# Altium PCB Boost.PcbDoc
Units mm, origin at the board's own origin, x right, y up, seen from the top; angles counter-clockwise.
Board outline 46 x 44 mm, 2 copper layers (Top Layer, Bottom Layer); 10 components, 6 nets, 34 pads, 0 vias.
Unrouted connection lines stored in the file: 2.
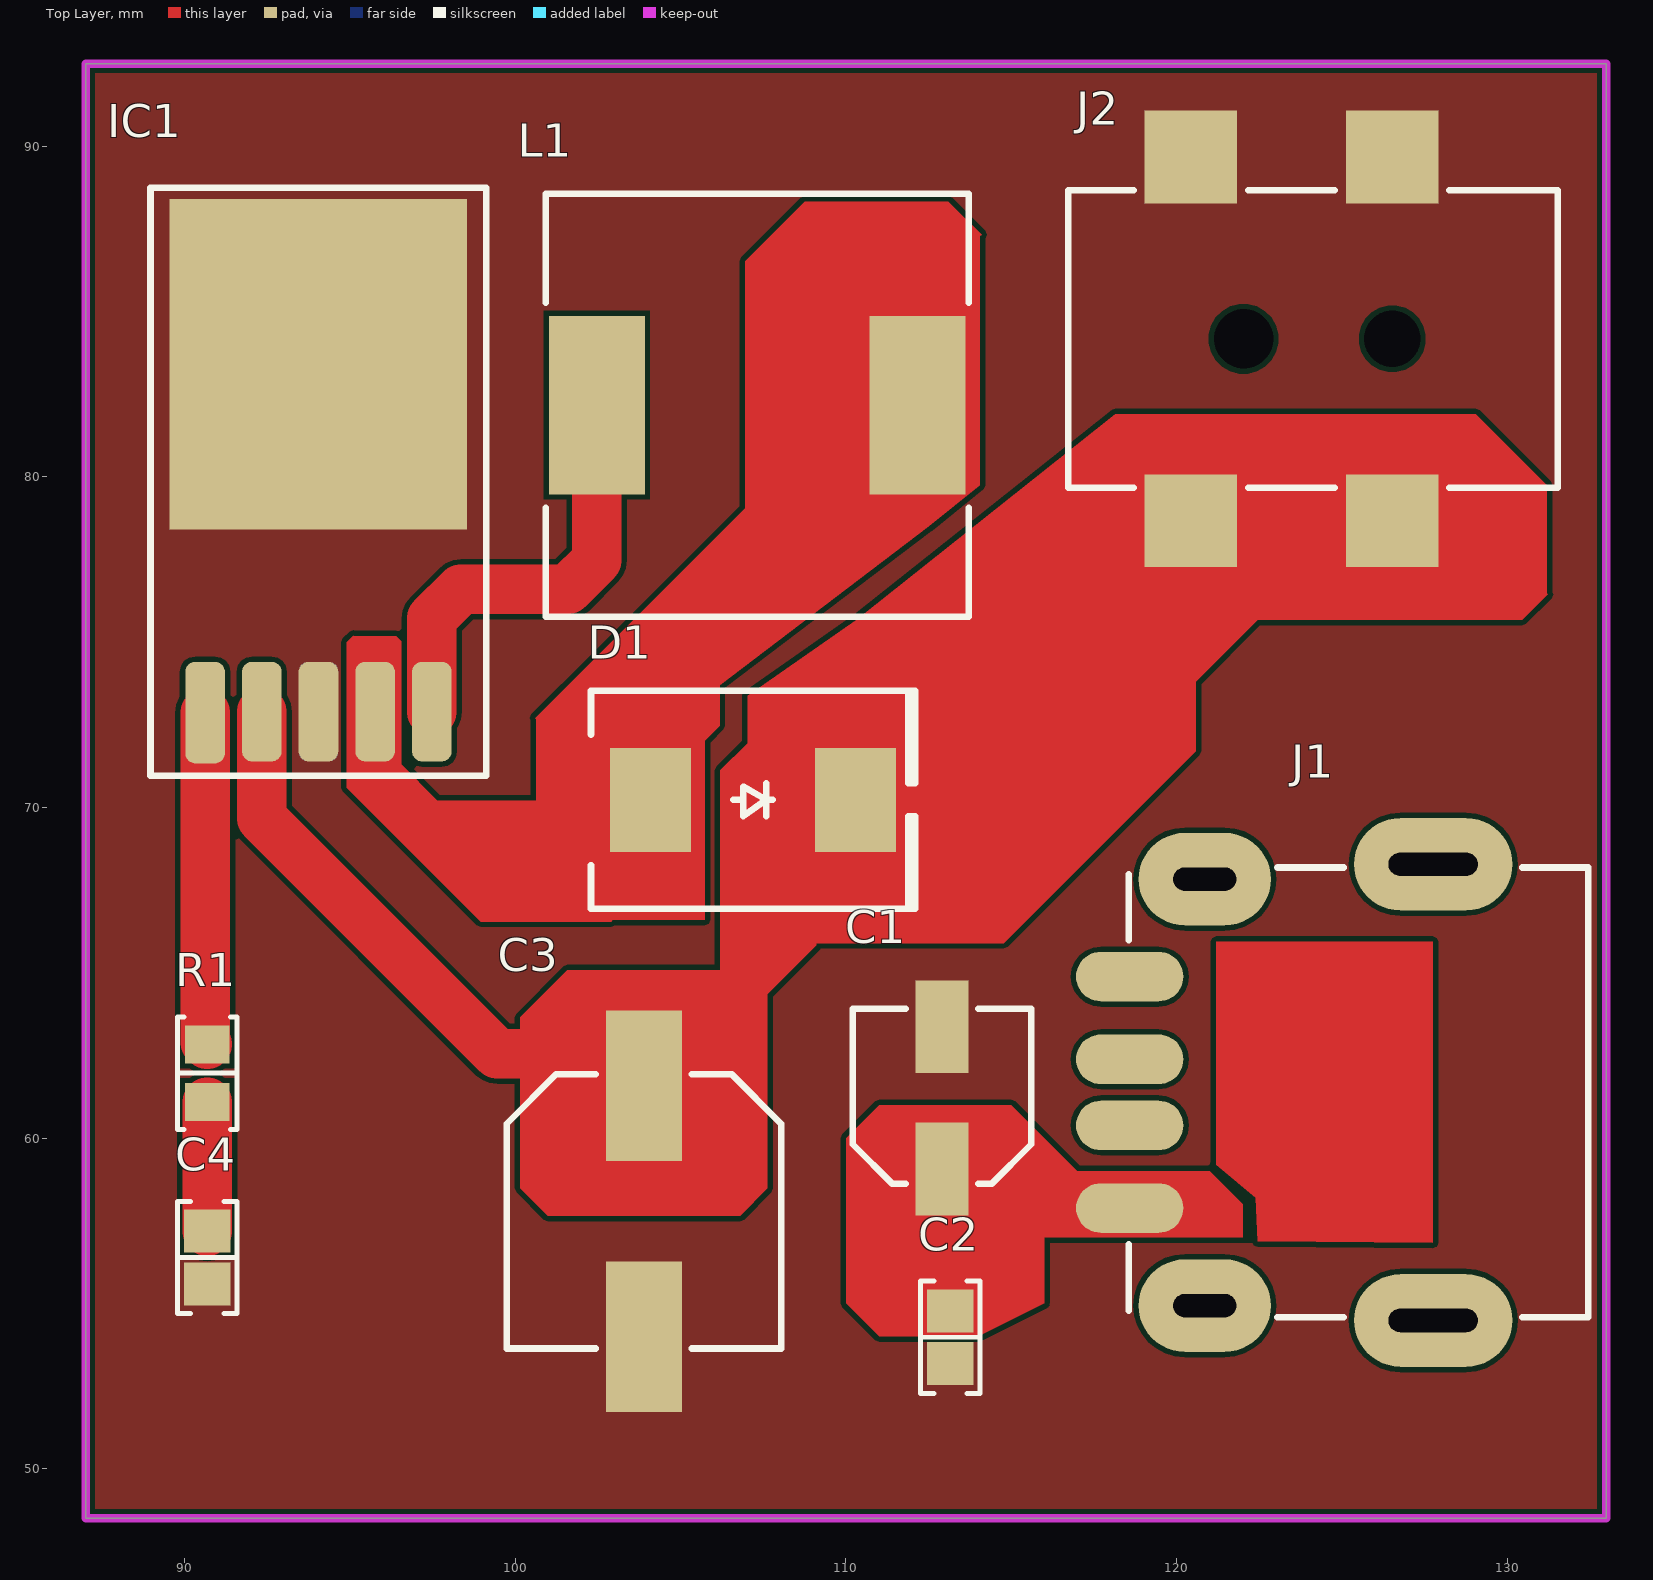
[diagram p0: Top Layer view]
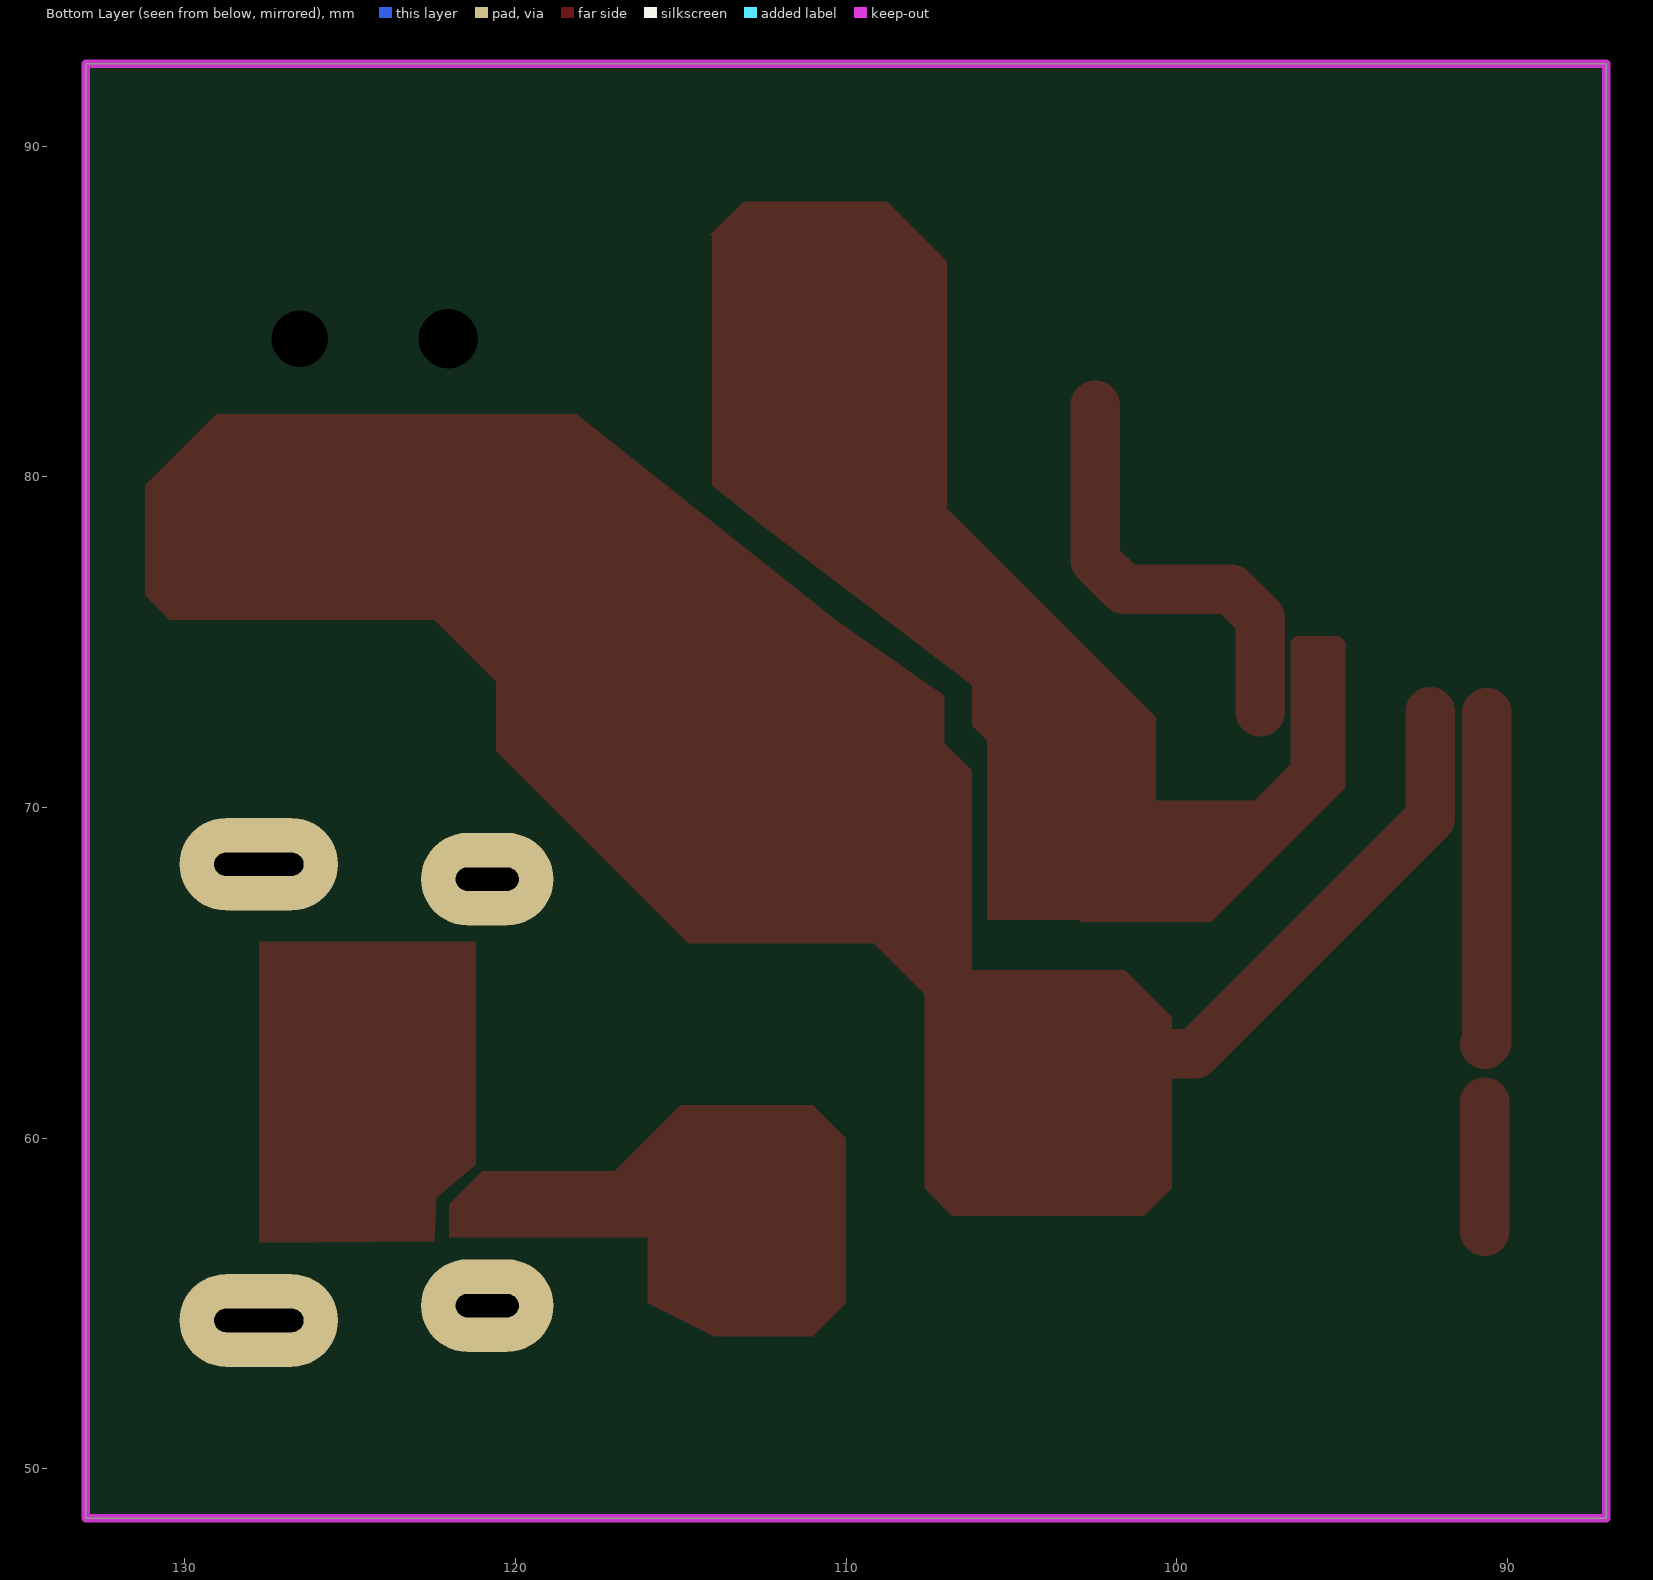
[diagram p1: Bottom Layer view, seen from below]
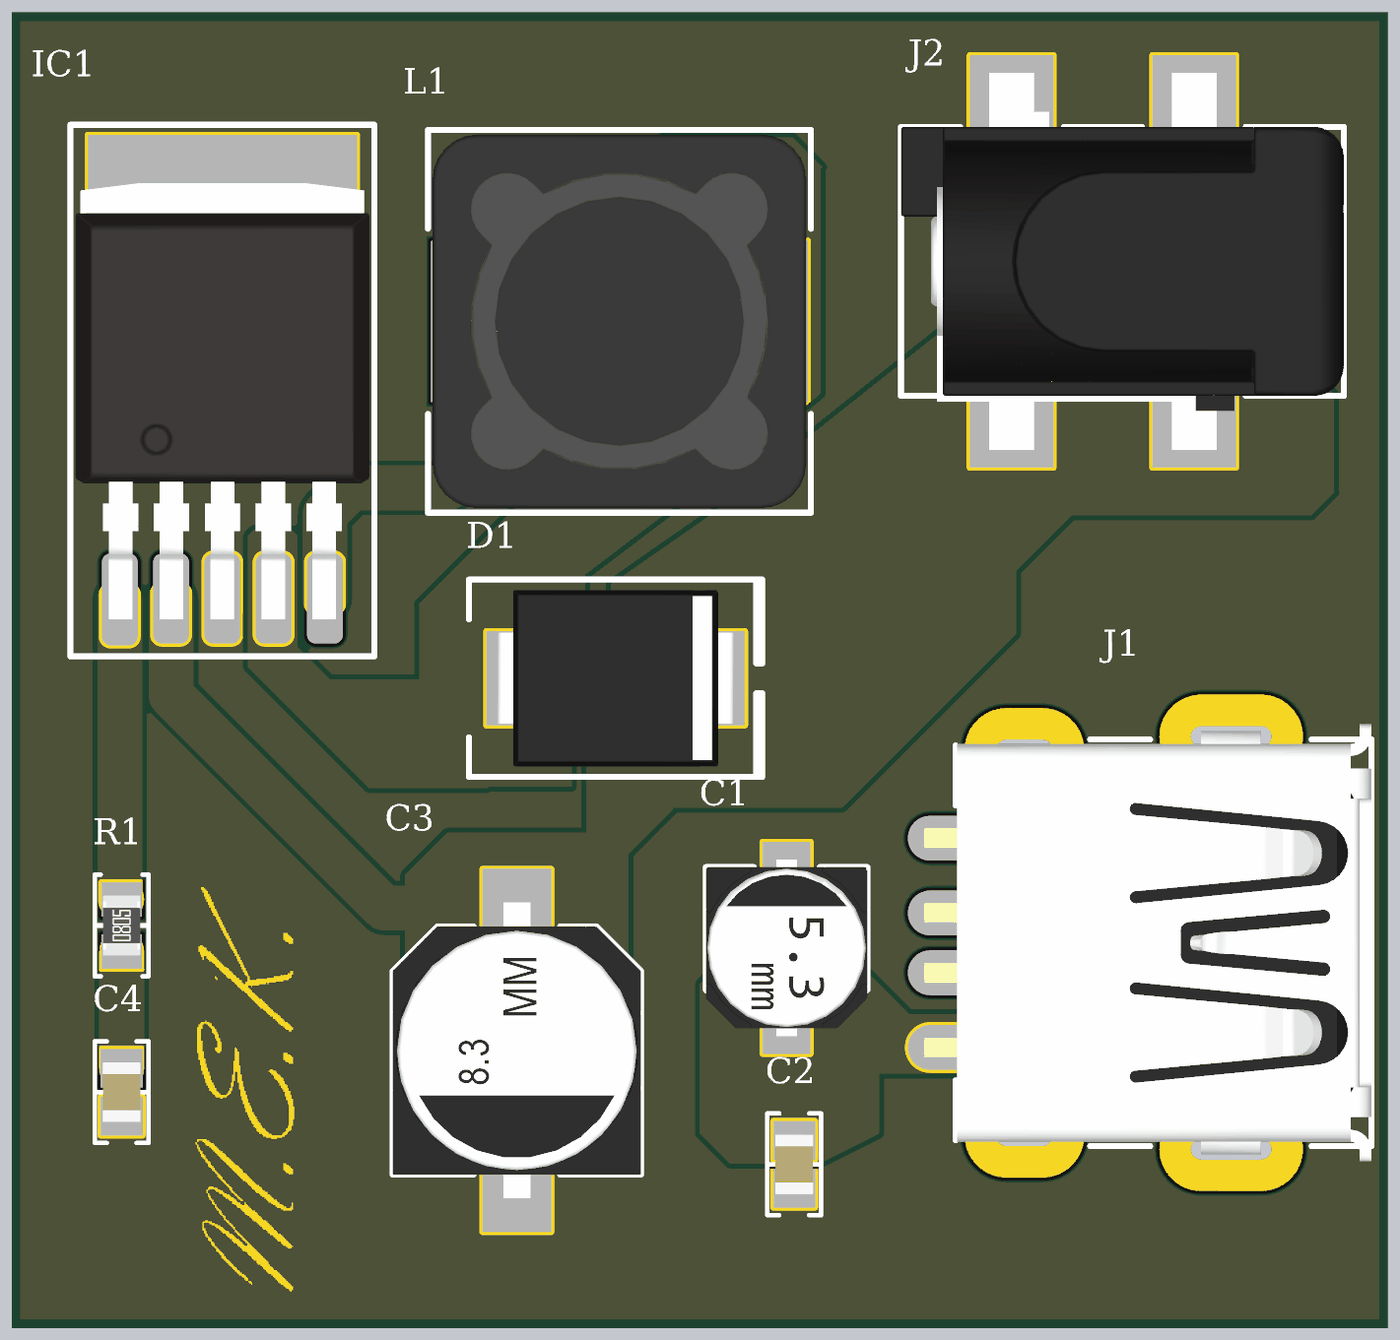
[diagram p2: 3D render of the assembled board from above, using the file's embedded part models]

## Layer stack, top to bottom
Top Solder: solder mask 0.0102, Solder Resist, Dk 3.5
Top Layer: signal copper 0.0356
Dielectric 1: dielectric 0.32, FR-4, Dk 4.8
Bottom Layer: signal copper 0.0356
Bottom Solder: solder mask 0.0102, Solder Resist, Dk 3.5

## Board outline
87,48.5 133,48.5 133,92.5 87,92.5

## Design rules (kind name [scope] priority, off if disabled: settings)
Clearance [All] p1: gap=0.152 ignorepadtopadclearanceinfootprint=FALSE
PolygonConnect [All] p1: connectstyle=Direct reliefconductorwidth=0.254 reliefentries=4 polygonreliefangle="90 Angle" airgapwidth=0.254
RoutingVias [All] p1: holewidth=0.5 width=0.7 viastyle="Through Hole" minholewidth=0.3 minwidth=0.5 maxholewidth=1 maxwidth=2
SolderMaskExpansion [All] p1: expansion=0.102 istentingtop=FALSE
Width [All] p1: maxlimit=5 minlimit=0.152 preferedwidth=0.5
30 further rules are at their usual default settings.

## Classes and differential pairs
component class Boost: C1 C2 C3 C4 D1 IC1 J2 L1 R1

## Components (designator, comment, footprint, x,y, rotation, side; value= is the part's Value field where it differs from the comment)
C1 "100µF" "CAP ALSMD 5.3MM H5.4MM" 112.903,61.214 r90 top
C2 "0.1µF" "CAP 0805_2012" 113.157,53.975 r90 top
C3 "680µF" "CAP ALSMD 8.3MM H10.5MM" 103.886,57.785 r270 top
C4 "1µF" "CAP 0805_2012" 90.678,56.388 r90 top
D1 "SURS8360T3G" "DO214AB SMC" 107.188,70.231 r0 top
IC1 "LM2587" D2PAK 94.043,81.758 r0 top
J1 "1932638-3" "TE 1932638-3 USB2.0A" 120.852,61.383 r90 top
J2 "PJ-002AH-SMT-TR" "CUI PJ-002AH-SMT-TR" 124.275,84.175 r180 top
L1 "15µH" "BOURNS SRR1280" 107.315,82.169 r0 top
R1 "3 kOhms" "RES 0805_2012" 90.678,61.962 r90 top

## Footprints (in the part's own frame and the unit in brackets; to place one, negate y for a bottom-side part, rotate by r counter-clockwise, add the part's x,y. Pads: shape width x height; smd on the part's side, far side on the other; paste and mask are expansions set on the pad)
"BOURNS SRR1280" [mm] "Precision Wire Wound Inductor, 2-Leads, Body 12.50x12.50mm, IPC Medium Density"
  rect 2.9x5.4 smd: 1(-4.85,0) 2(4.85,0)
  silkscreen extent -6.4,-6.4 6.4,6.4, body extent -6.25,-6.25 6.25,6.25, height 7.9
"CAP 0805_2012" [mm] "Chip Capacitor, 2-Leads, Body 2.00x1.20mm, IPC Medium Density"
  rect 1.3x1.4 smd: 1(-0.8,0) 2(0.8,0)
  silkscreen extent -1.7,-0.9 1.7,0.9, body extent -1,-0.64 1,0.64, height 1.26
"CAP ALSMD 5.3MM H5.4MM" [mm] "Aluminum Electrolytic Capacitor, Body 5.30x5.30x5.40mm, IPC Low Density"
  rect 2.8x1.6 smd: 1(-2.15,0) 2(2.15,0)
  silkscreen extent -2.6,-2.7 2.7,2.7, body extent -2.95,-2.7 2.95,2.7, height 5.4
"CAP ALSMD 8.3MM H10.5MM" [mm] "Aluminum Electrolytic Capacitor, Body 8.30x8.30x10.50mm, IPC Low Density"
  rect 4.55x2.3 smd: 1(-3.8,0) 2(3.8,0)
  silkscreen extent -4.15,-4.15 4.15,4.15, body extent -4.95,-4.15 4.95,4.15, height 10.5
"CUI PJ-002AH-SMT-TR" [mm]
  rect 2.8x2.8 smd: 1(-2.25,5.5) 1(3.85,5.5) 2(-2.25,-5.5) 3(3.85,-5.5)
  round 0 hole 1.7 unplated: M(-2.25,0)
  round 0 hole 1.8 unplated: M(2.25,0)
  silkscreen extent -7.25,-4.5 7.55,4.5, body extent -7.25,-6.3 7.55,6.3, height 11.4
D2PAK [mm]
  rrect50% 1.2x3.075 smd: 1(-3.429,-8.89)
  rrect50% 1.2x3.015 smd: 2(-1.714,-8.86) 3(0,-8.86) 4(1.714,-8.86) 5(3.429,-8.86)
  rect 9x10 smd: 3(0,1.651)
  silkscreen extent -5.08,-10.79 5.08,6.98, body extent -4.91,-9.56 4.91,5.04, height 4.22
"DO214AB SMC" [mm] "Molded Diode, 2-Leads, Body 6.85x5.90mm, IPC Medium Density"
  rect 2.45x3.15 smd: 1(-3.1,0) 2(3.1,0)
  silkscreen extent -4.9,-3.3 4.9,3.3, body extent -3.97,-2.95 3.97,2.95, height 2.6
"RES 0805_2012" [mm] "Chip Resistor, 2-Leads, Body 2.00x1.25mm, IPC Medium Density"
  rect 1.15x1.35 smd: 1(-0.875,0) 2(0.875,0)
  silkscreen extent -1.7,-0.9 1.7,0.9, body extent -1,-0.62 1,0.63, height 0.6
"TE 1932638-3 USB2.0A" [mm] "USB 2.0 Type A RCP 4 POS Solder RA SMD 4 Terminal 1 Port T/R"
  oval 1.5x3.25 smd: 1(-3.5,2.27) 2(-1,2.27) 3(1,2.27) 4(3.5,2.27)
  oval 2.8x4.8 hole 0.7 slot 2.7 at 90 deg: S(-6.9,-6.91) S(6.9,-6.91)
  oval 2.8x4 hole 0.7 slot 1.9 at 90 deg: S(-6.45,0) S(6.45,0)
  Top Layer pour cut-out: -4.55,-0.35 -4.55,-6.9 4.55,-6.9 4.55,-0.35
  silkscreen extent -6.8,-11.6 6.8,2.3, body extent -7.32,-11.6 7.32,3.34, height 7.64

## Part data
C1: library part EEE-1AA101WR, "CAP ALUM 100UF 20% 10V SMD", Device Package="Radial, Can - SMD", Lifetime @ Temp.="1000 Hrs @ 85°C", Manufacturer="Panasonic Electronic Components", Operating Temperature="-40°C ~ 85°C", Ratings=AEC-Q200, Ripple Current @ High Frequency="85mA @ 10kHz", Ripple Current @ Low Frequency="50mA @ 120Hz", Supplier Part Number 1=PCE3867CT-ND, Tolerance=±20%, Voltage - Rated=10V, Applications=Automotive, Capacitance=100µF, ComponentLink1Description=Datasheet, ComponentLink1URL=//media.digikey.com/pdf/Data%20Sheets/Panasonic%20Electronic%20Components/S_Series,Type_V_Rev2018.pdf, ComponentLink2Description="DigiKey Link", ComponentLink2URL=http://digikey.com/product-detail/en/panasonic-electronic-components/EEE-1AA101WR/PCE3867CT-ND/766243, Height - Seated (Max)="0.213\" (5.40mm)", LastUpdated="2.09.2020 01:25:24", Lifecycle Status=Active, Minimum Order=1, Mounting Type="Surface Mount", Package / Case="Radial, Can - SMD", Packaging=TapeAndReel, Part Number=EEE-1AA101WR, Part Status=Active, PartId=7834, Polarization=Polar, Price=0.08, Series=S, Size / Dimension="0.197\" Dia (5.00mm)", Supplier 1=DigiKey, Surface Mount Land Size="0.209\" L x 0.209\" W (5.30mm x 5.30mm)"
C2: library part C0805C104J8RACTU, "CAP CER 0.1UF 10V X7R 0805", Device Package="0805 (2012 Metric)", Manufacturer=KEMET, Operating Temperature="-55°C ~ 125°C", Supplier Part Number 1=399-7998-1-ND, Temperature Coefficient=X7R, Tolerance=±5%, Voltage - Rated=10V, Applications="Bypass, Decoupling", Capacitance=0.1µF, ComponentLink1Description=Datasheet, ComponentLink1URL=https://api.kemet.com/component-edge/download/datasheet/C0805C104J8RACTU.pdf, ComponentLink2Description="DigiKey Link", ComponentLink2URL=http://digikey.com/product-detail/en/kemet/C0805C104J8RACTU/399-7998-1-ND/3471721, LastUpdated="2.09.2020 01:04:35", Lifecycle Status=Active, Minimum Order=1, Mounting Type="Surface Mount, MLCC", Package / Case="0805 (2012 Metric)", Packaging=TapeAndReel, Part Number=C0805C104J8RACTU, Part Status=Active, PartId=6082, Price=0.14, Series="SMD Comm X7R", Size / Dimension="0.079\" L x 0.049\" W (2.00mm x 1.25mm)", Supplier 1=DigiKey, Thickness (Max)="0.035\" (0.88mm)"
C3: library part EEE-FT1C681GP, "CAP ALUM 680UF 20% 16V SMD", Device Package="Radial, Can - SMD", ESR (Equivalent Series Resistance)="80mOhm @ 100kHz", Lifetime @ Temp.="5000 Hrs @ 105°C", Manufacturer="Panasonic Electronic Components", Operating Temperature="-55°C ~ 105°C", Ratings=AEC-Q200, Ripple Current @ Low Frequency="595mA @ 120Hz", Supplier Part Number 1=PCE5114CT-ND, Tolerance=±20%, Voltage - Rated=16V, Applications=Automotive, Capacitance=680µF, ComponentLink1Description=Datasheet, ComponentLink1URL=https://na.industrial.panasonic.com/file-download/3112, ComponentLink2Description="DigiKey Link", ComponentLink2URL=http://digikey.com/product-detail/en/panasonic-electronic-components/EEE-FT1C681GP/PCE5114CT-ND/6048926, Height - Seated (Max)="0.413\" (10.50mm)", LastUpdated="2.09.2020 01:25:14", Lifecycle Status=Active, Minimum Order=1, Mounting Type="Surface Mount", Package / Case="Radial, Can - SMD", Packaging=TapeAndReel, Part Number=EEE-FT1C681GP, Part Status=Active, PartId=7673, Polarization=Polar, Price=0.37, Series=FT, Size / Dimension="0.315\" Dia (8.00mm)", Supplier 1=DigiKey, Surface Mount Land Size="0.327\" L x 0.327\" W (8.30mm x 8.30mm)"
C4: library part MM05ZC105KCZ2A, "CAP CER 1UF 10V X7R 0805", Device Package="0805 (2012 Metric)", Manufacturer="AVX Corporation", Operating Temperature="-55°C ~ 125°C", Supplier Part Number 1=478-10611-1-ND, Temperature Coefficient=X7R, Tolerance=±10%, Voltage - Rated=10V, Applications="Medical, Non-Critical", Capacitance=1µF, ComponentLink1Description=Datasheet, ComponentLink1URL=http://datasheets.avx.com/AVX-MM.pdf, ComponentLink2Description="DigiKey Link", ComponentLink2URL=http://digikey.com/product-detail/en/avx-corporation/MM05ZC105KCZ2A/478-10611-1-ND/7344872, LastUpdated="2.09.2020 01:04:42", Lifecycle Status=Active, Minimum Order=1, Mounting Type="Surface Mount, MLCC", Package / Case="0805 (2012 Metric)", Packaging=TapeAndReel, Part Number=MM05ZC105KCZ2A, Part Status=Active, PartId=2439, Price=0.50, Series=MM, Size / Dimension="0.079\" L x 0.049\" W (2.01mm x 1.25mm)", Supplier 1=DigiKey, Thickness (Max)="0.029\" (0.74mm)"
D1: "DIODE GEN PURP 600V 3A SMC", Current - Average Rectified (Io)=3A, Current - Reverse Leakage @ Vr="10µA @ 600V", Manufacturer="ON Semiconductor", Operating Temperature - Junction="-65°C ~ 175°C", Package / Case="DO-214AB, SMC", Supplier Device Package=SMC, Supplier Part Number 1=SURS8360T3GOSCT-ND, Voltage - DC Reverse (Vr) (Max)=600V, Voltage - Forward (Vf) (Max) @ If="1.25V @ 3A", ComponentLink1Description=Datasheet, ComponentLink1URL=http://www.onsemi.com/pub/Collateral/MURS320T3-D.PDF, ComponentLink2Description="DigiKey Link", ComponentLink2URL=http://digikey.com/product-detail/en/on-semiconductor/SURS8360T3G/SURS8360T3GOSCT-ND/9087771, Diode Type=Standard, LastUpdated="2020-09-02 01:18:57", Lifecycle Status=Active, Minimum Order=1, Mounting Type="Surface Mount", Packaging=TapeAndReel, Part Number=SURS8360T3G, Part Status=Active, PartId=348, Price=0.30, Reverse Recovery Time (trr)=75ns, Series=-, Speed="Fast Recovery =< 500ns, > 200mA (Io)", Supplier 1=DigiKey
IC1: "Boost Converter"
J1: "CONN RCPT USB2.0 TYPEA 4P SMD RA", Current Rating (Amps)="1A per Contact", Manufacturer="TE Connectivity AMP Connectors", Operating Temperature="-55°C ~ 85°C", Supplier Part Number 1=A117902TR-ND, Voltage - Rated=30VAC, ComponentLink1Description=Datasheet, ComponentLink1URL=https://www.te.com/commerce/DocumentDelivery/DDEController?Action=srchrtrv&DocNm=501-60007-1&DocType=SS&DocLang=EN, ComponentLink2Description="DigiKey Link", ComponentLink2URL=//digikey.com/product-detail/en/te-connectivity-amp-connectors/1932638-3/A117902TR-ND/4731612, Connector Type="USB - A", Features="Solder Retention", Gender=Receptacle, LastUpdated="9.12.2019 20:47:08", Lifecycle Status=0, Mating Cycles=1500, Minimum Order=1, Mounting Feature=Horizontal, Mounting Type="Surface Mount, Right Angle", Number of Contacts=4, Number of Ports=1, Packaging=TapeAndReel, Part Number=1932638-3, Part Status=Active, Price=0.97, Series=-, Shielding=Shielded, Specifications="USB 2.0", Supplier 1=DigiKey, Termination=Solder
J2: "CONN PWR JACK 2X5.5MM SOLDER", Current Rating (Amps)=5A, Manufacturer="CUI Devices", Material Flammability Rating="UL94 V-0", Supplier Part Number 1=CP-002AHPJCT-ND, Voltage - Rated=24VDC, Actual Diameter="0.079\" (2.00mm ID), 0.256\" (6.50mm OD)", ComponentLink1Description=Datasheet, ComponentLink1URL=https://www.cuidevices.com/product/resource/digikeypdf/pj-002ah-smt-tr.pdf, ComponentLink2Description="DigiKey Link", ComponentLink2URL=http://digikey.com/product-detail/en/cui-devices/PJ-002AH-SMT-TR/CP-002AHPJCT-ND/669692, Connector Type=Jack, Features="Board Guide", Gender=Male, LastUpdated="26.05.2020 13:33:39", Lifecycle Status=Active, Mating Length/Depth="0.350\" (8.90mm)", Minimum Order=1, Mounting Type="Surface Mount", Number of Positions/Contacts="2 Conductors, 3 Contacts", Packaging=TapeAndReel, Part Number=PJ-002AH-SMT-TR, Part Status=Active, Price=0.90, Series=-, Shielding=Unshielded, Supplier 1=DigiKey, Termination=Solder, Industry Recognized Mating Diameter="2.00mm ID (0.079\"), 5.50mm OD (0.217\")", Internal Switch(s)="Single Switch, Normally Closed"
L1: library part SRR1280-150M, "FIXED IND 15UH 5.2A 28.5MOHM SMD", Current - Saturation=5A, Current Rating (Amps)=5.2A, DC Resistance (DCR)="28.5mOhm Max", Device Package=Nonstandard, Frequency - Self Resonant=13MHz, Manufacturer="Bourns Inc.", Operating Temperature="-40°C ~ 125°C", Q @ Freq="26 @ 2.52MHz", Supplier Part Number 1=SRR1280-150MCT-ND, Tolerance=±20%, Inductance Frequency - Test=100kHz, ComponentLink1Description=Datasheet, ComponentLink1URL=https://www.bourns.com/docs/Product-Datasheets/SRR1280.pdf, ComponentLink2Description="DigiKey Link", ComponentLink2URL=http://digikey.com/product-detail/en/bourns-inc/SRR1280-150M/SRR1280-150MCT-ND/2127431, Height - Seated (Max)="0.315\" (8.00mm)", LastUpdated="2.09.2020 01:22:10", Lifecycle Status=Active, Material - Core=Ferrite, Minimum Order=1, Mounting Type="Surface Mount", Package / Case=Nonstandard, Packaging=TapeAndReel, Part Number=SRR1280-150M, Part Status=Active, PartId=20, Price=0.65, Series=SRR1280, Shielding=Shielded, Size / Dimension="0.492\" L x 0.492\" W (12.50mm x 12.50mm)", Supplier 1=DigiKey, Type=Wirewound, Inductance=15µH
R1: library part RT0805DRD073KL, "RES SMD 3K OHM 0.5% 1/8W 0805", Device Package="0805 (2012 Metric)", Manufacturer=Yageo, Operating Temperature="-55°C ~ 155°C", Power (Watts)="0.125W, 1/8W", Supplier Device Package=0805, Supplier Part Number 1=311-2744-1-ND, Temperature Coefficient=±25ppm/°C, Tolerance=±0.5%, ComponentLink1Description=Datasheet, ComponentLink1URL=https://www.yageo.com/upload/media/product/productsearch/datasheet/rchip/PYu-RT_1-to-0.01_RoHS_L_11.pdf, ComponentLink2Description="DigiKey Link", ComponentLink2URL=http://digikey.com/product-detail/en/yageo/RT0805DRD073KL/311-2744-1-ND/6129163, Composition="Thin Film", Height - Seated (Max)="0.024\" (0.60mm)", LastUpdated="2.09.2020 01:15:24", Lifecycle Status=Active, Minimum Order=1, Number of Terminations=2, Package / Case="0805 (2012 Metric)", Packaging=TapeAndReel, Part Number=RT0805DRD073KL, Part Status=Active, PartId=27799, Price=0.03, Resistance="3 kOhms", Series=RT, Size / Dimension="0.079\" L x 0.049\" W (2.00mm x 1.25mm)", Supplier 1=DigiKey

## Nets (pads, with @x,y where several pads share a name; then routed paths per layer and width w, separated by ;. In a path a pad name is that pad's centre, name@x,y a point inside that pad or via, vN(x,y) a via of type N, cw(c..) or ccw(c..) an arc to the next point about the centre after c; other vN are vias at no path point)
+5: C1.1 C2.2 IC1.5 J1.1 L1.1 | length 13.2
  Top Layer w1.5: IC1.5 97.472,75.721 98.351,76.6 101.586,76.6 102.465,77.479 L1.1
+12: C3.1 D1.2 IC1.2 J2.1 | length 16.1
  Top Layer w1.5: IC1.2 92.329,69.671 99.45,62.55 102.3,62.55
GND: C1.2 C2.1 C3.2 C4.1 IC1.3 J2.2 J2.3
NetC4_2: C4.2 R1.1 | length 3.9
  Top Layer w1.5: C4.2 R1.1
NetD1_1: D1.1 IC1.4 L1.2
NetR1_2: IC1.1 R1.2 | length 10.1
  Top Layer w1.5: IC1.1 90.614,62.9 R1.2
pads on no net: J1.2 J1.3 J1.4 J1.S J2.M

## Polygon pours and split planes (outlines as drawn)
GND on Top Layer "NONET_L-01_P-001" (solid, pour order 0): 87,92.5 87,48.5 133,48.5 133,92.5

## Keep-outs
Keep-Out Layer:
  the board outline again, w0.254

## Other copper
Top Layer:
  region net +12: 129.05,81.9 131.2,79.75 131.2,76.475 131.225,76.45 130.45,75.675 122.45,75.675 120.575,73.8 120.575,71.7 114.775,65.9 109.1,65.9 109.1,65.825 107.625,64.35 107.625,58.475 106.8,57.65 100.975,57.65 100.15,58.475 100.15,63.65 101.575,65.075 106.2,65.075 106.2,71.125 107.025,71.95 107.025,73.375 110.325,75.675 118.15,81.9
  region net GND: 121.202,65.933 121.202,59.197 122.4,58.2 122.45,56.875 127.752,56.833 127.752,65.933
  region net NetD1_1: 95.1,75.2 94.9,75 94.9,70.6 98.95,66.55 102.9,66.55 102.9,69.925 102.625,70.2 97.625,70.2 97.625,70.225 96.55,71.3 96.55,75.025 96.4,75.175
  region net NetD1_1: 112.5,78.5 114.05,79.75 114.05,87.275 114.1,87.325 113.1,88.325 108.75,88.325 106.95,86.525 106.95,79.05 102.45,74.55 100.6,72.7 100.625,72.675 100.625,68.825 102.9,66.55 102.95,66.6 105.725,66.6 105.725,72.025 106.175,72.475 106.175,73.7
  region net +5: 116,60 117,59 121,59 122,58 122,57 116,57
  region net +5: 115,61 111,61 110,60 110,55 111,54 114,54 116,55 116,60

## Silkscreen, mask and mechanical layers (free items; w line width, h text height)
Top Solder:
  drawing of 12 lines, arcs and shapes, not listed